# Altium PCB PCB1.PcbDoc
Units mm, origin at the board's own origin, x right, y up, seen from the top; angles counter-clockwise.
Board outline 130.25 x 130.25 mm, 2 copper layers (Top Layer, Bottom Layer); 100 components, 101 nets, 315 pads, 67 vias.
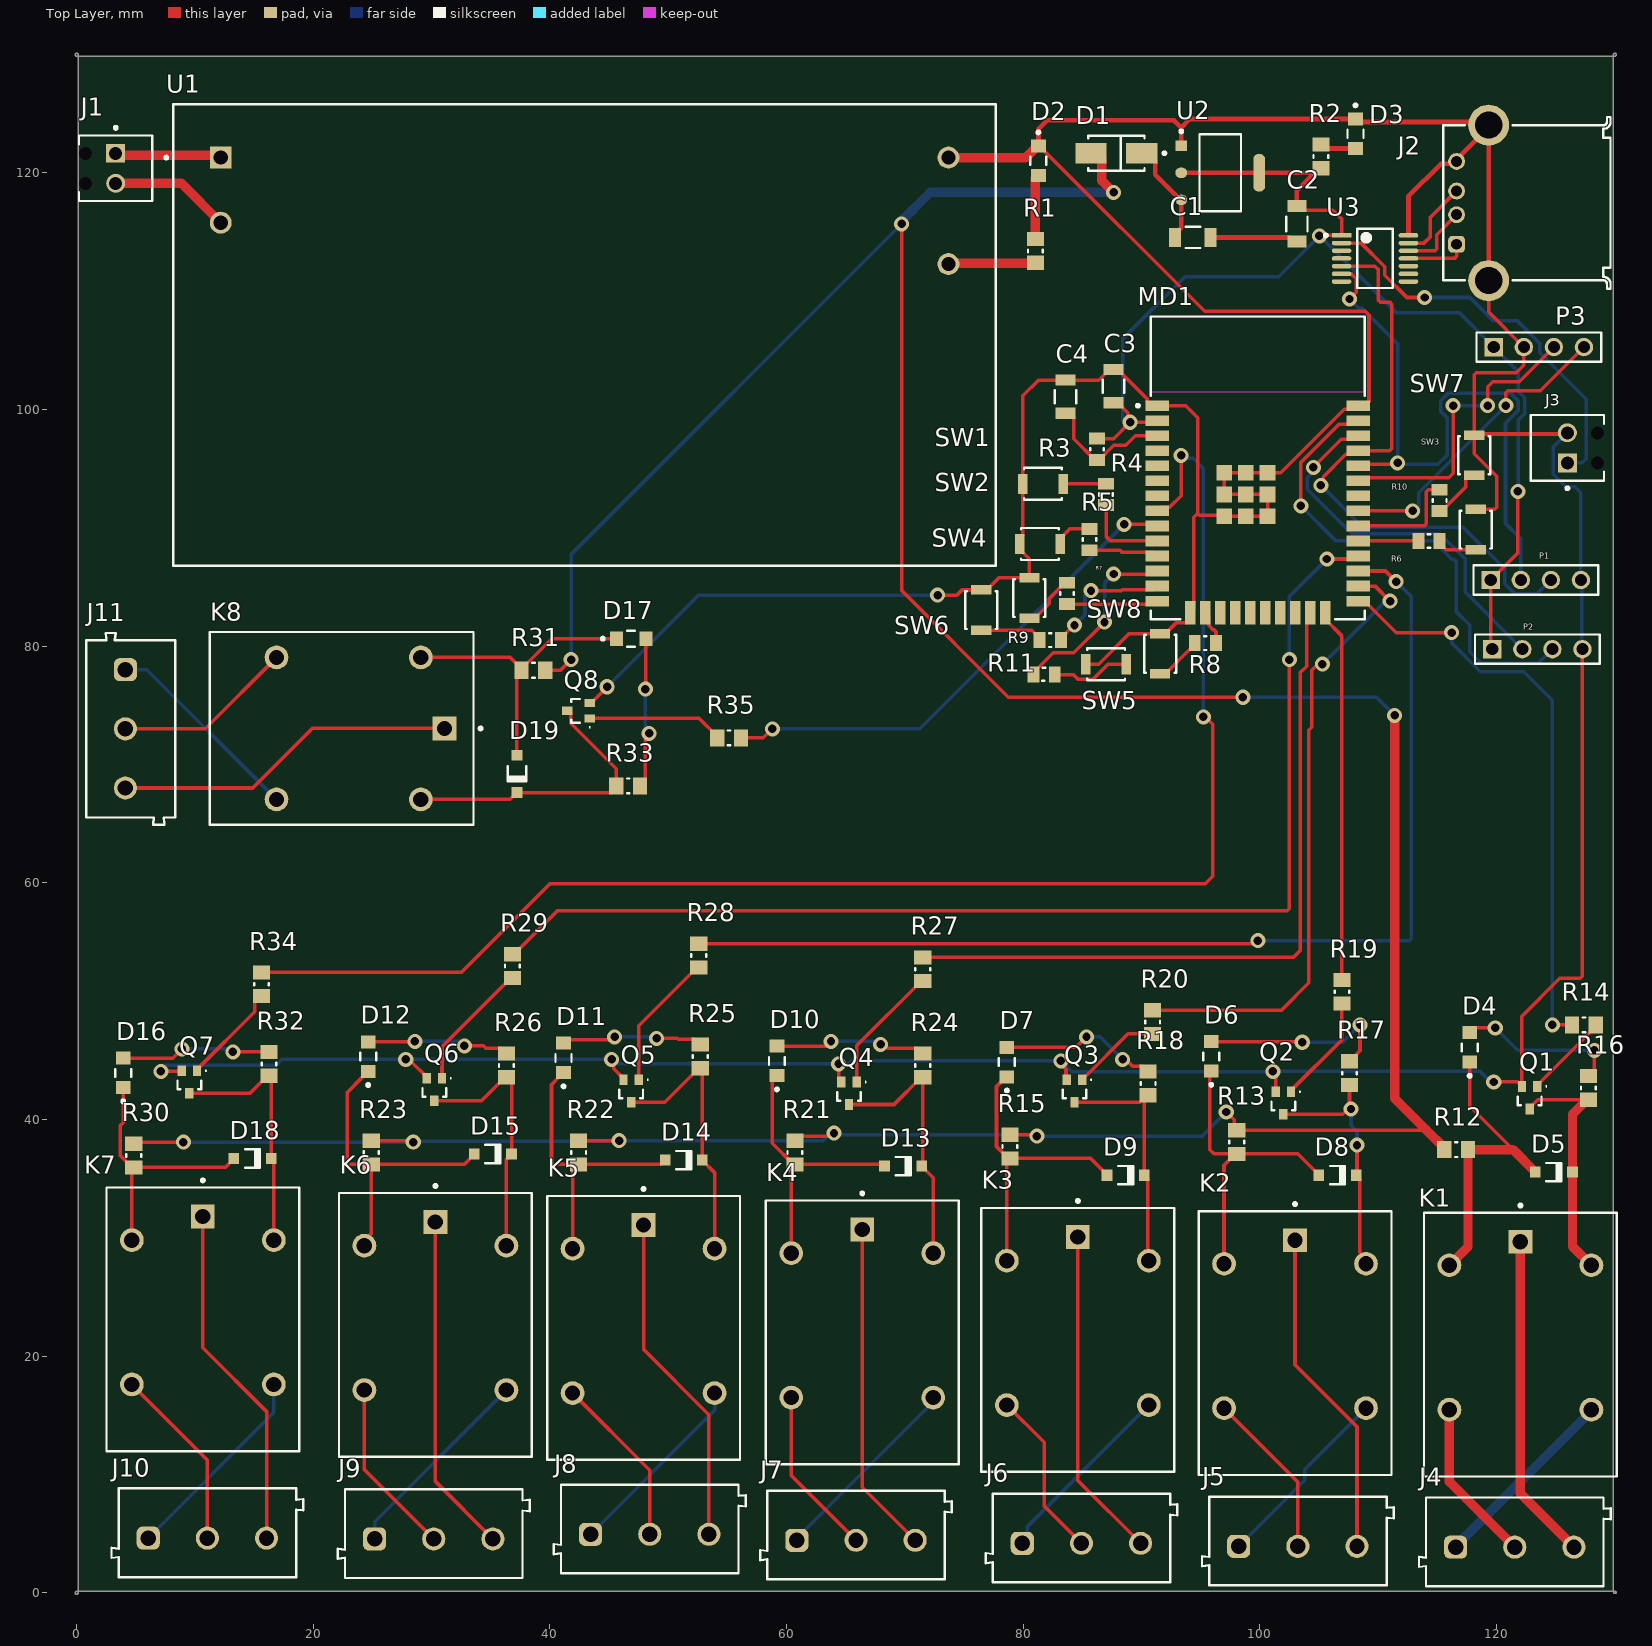
[diagram p0: Top Layer view]
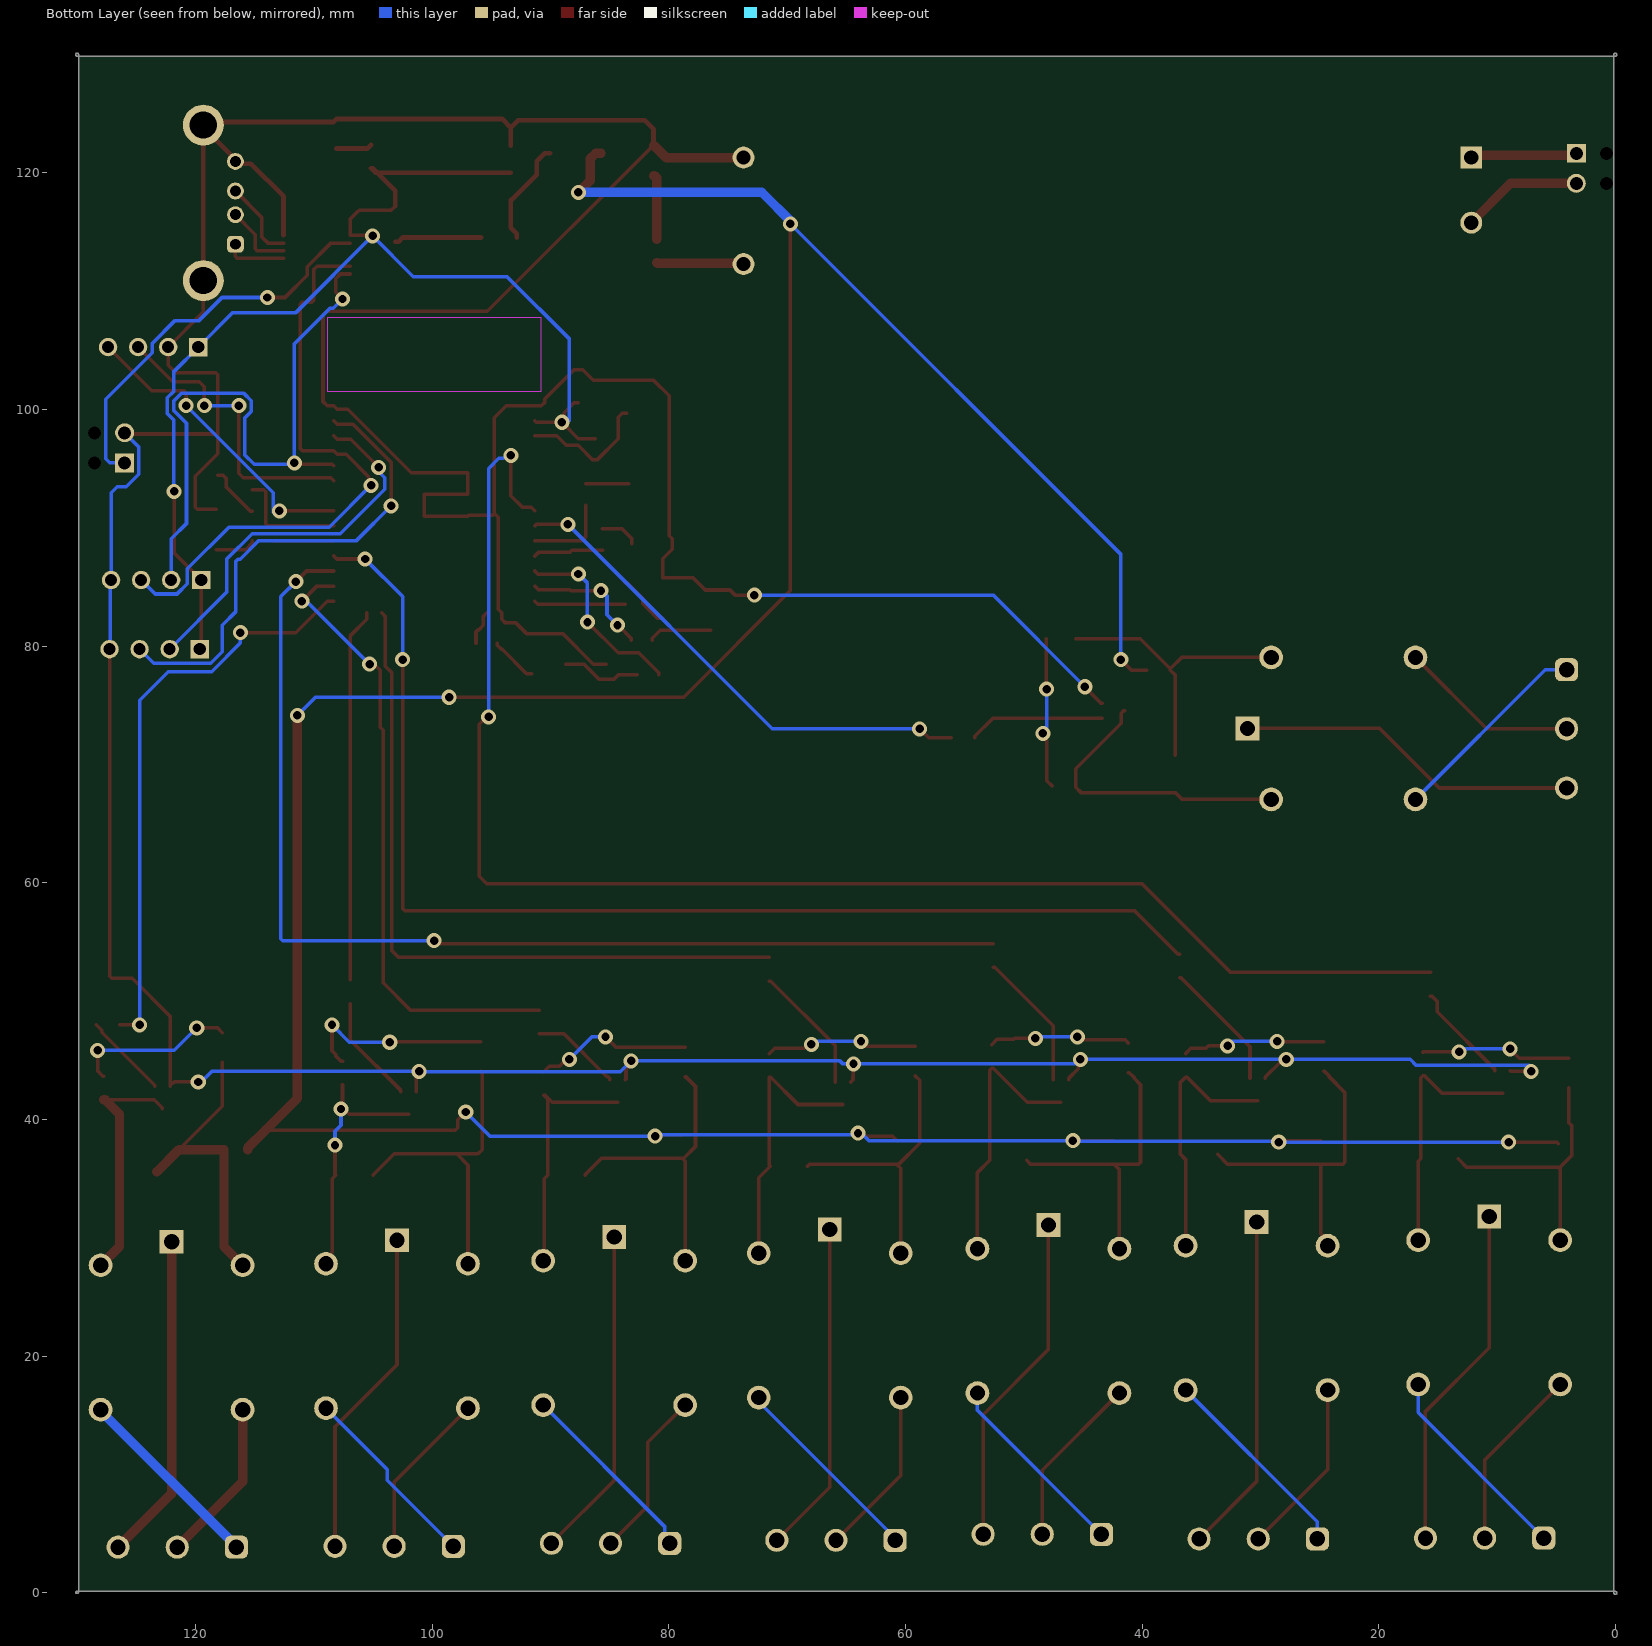
[diagram p1: Bottom Layer view, seen from below]
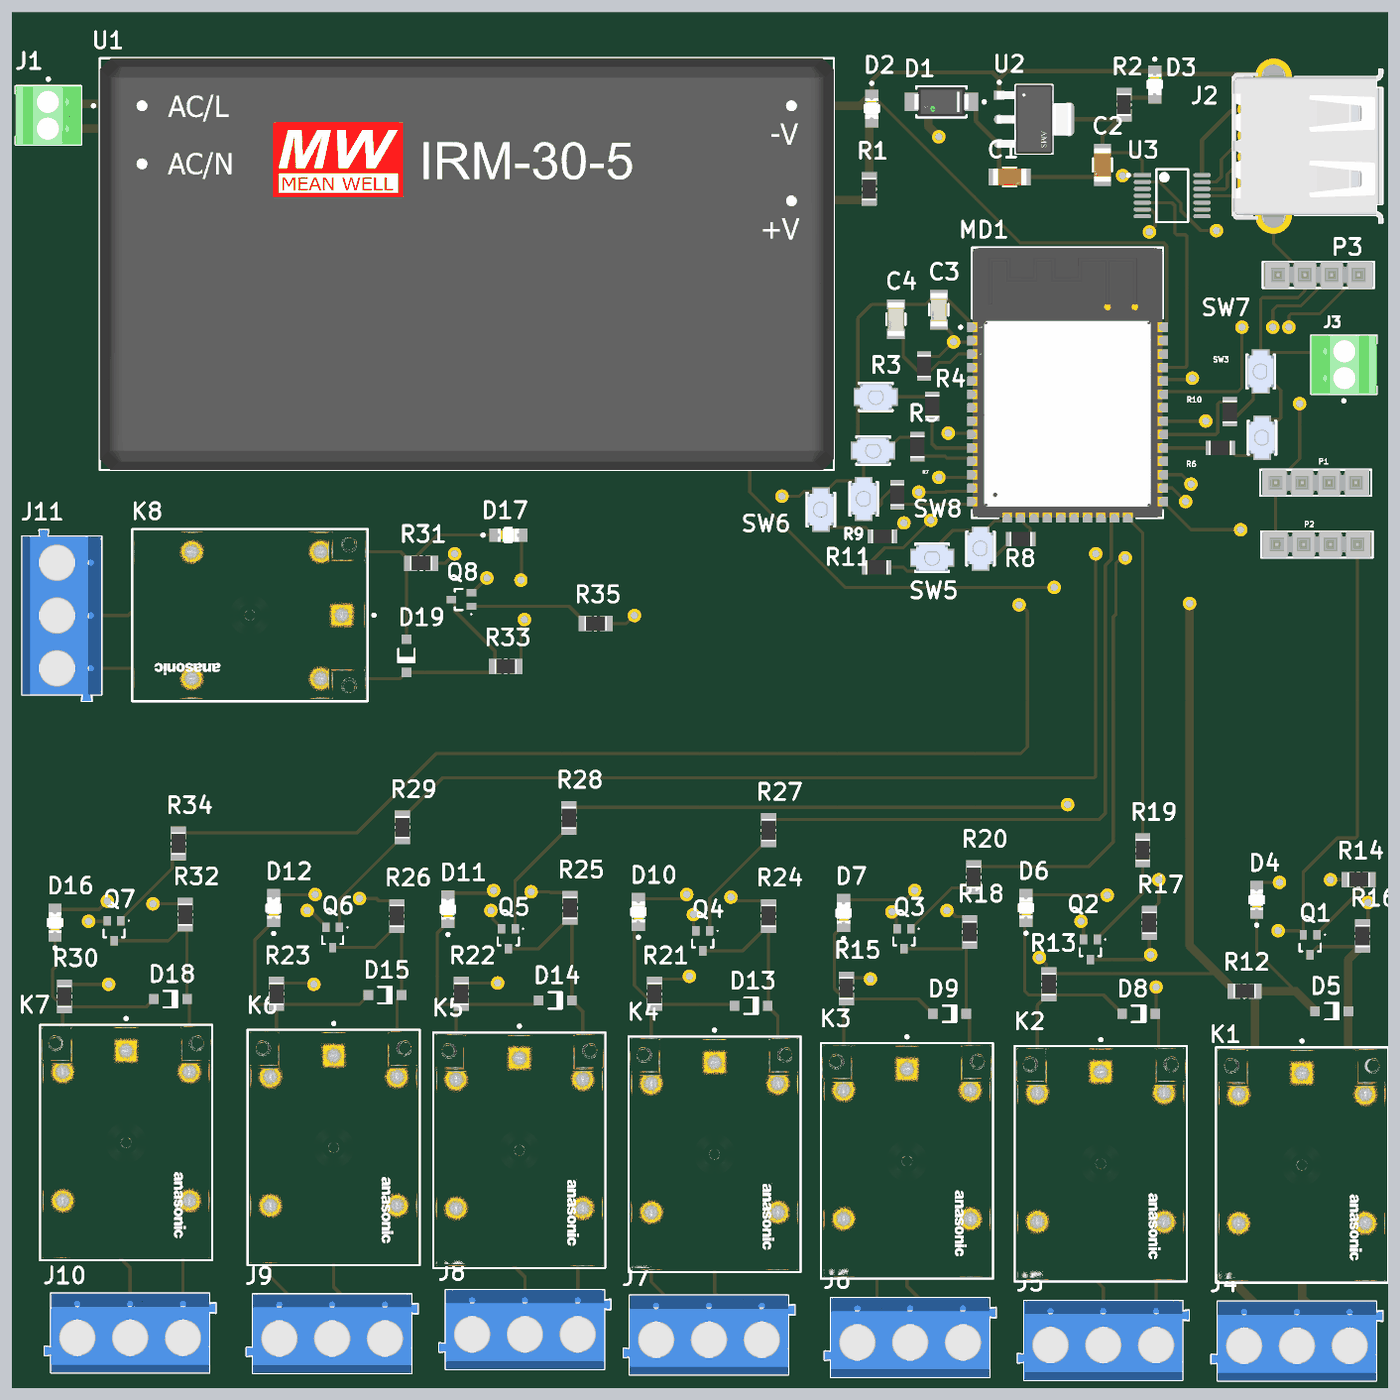
[diagram p2: 3D render of the assembled board from above, using the file's embedded part models]

## Layer stack, top to bottom
Top Solder: solder mask 0.0102, Solder Resist, Dk 3.5
Top Layer: signal copper 0.0356
Dielectric 1: dielectric 0.32, FR-4, Dk 4.8
Bottom Layer: signal copper 0.0356
Bottom Solder: solder mask 0.0102, Solder Resist, Dk 3.5

## Board outline
0,-0.127 cw(c0,0) -0.127,0 cw(c0,0) 0,0.127 130,0.127 cw(c130,0) 130.121,0.039 cw(c130,0.079) 129.873,0.079 129.873,130 cw(c130,130) 130,130.127 cw(c130,130) 130.127,130 cw(c130,130) 130,129.873 0,129.873 cw(c0,130) -0.127,130 cw(c0,130) 0,130.127 cw(c0,130) 0.127,130 0.127,0 cw(c0,0)

## Design rules (kind name [scope] priority, off if disabled: settings)
Clearance [All] p1: gap=0.254 ignorepadtopadclearanceinfootprint=FALSE
PolygonConnect [All] p1: connectstyle=Relief reliefconductorwidth=0.254 reliefentries=4 polygonreliefangle="90 Angle" airgapwidth=0.254
RoutingVias [All] p1: holewidth=0.711 width=1.27 viastyle="Through Hole" minholewidth=0.711 minwidth=1.27 maxholewidth=0.711 maxwidth=1.27
SilkToSilkClearance [All] p1: silktosilkclearance=0.256
SolderMaskExpansion [All] p1: expansion=0 istentingtop=FALSE
SupplyNets "Schematic Supply Nets_2" [InNet('+5')] p1: voltage=0.000
SupplyNets "Schematic Supply Nets_1" [InNet('+3.3V')] p2: voltage=0.000
SupplyNets "Schematic Supply Nets" [InNet('GND')] p3: voltage=0.000
Width [All] p1: maxlimit=5 minlimit=0.254 preferedwidth=0.3
29 further rules are at their usual default settings.

## Classes and differential pairs
component class Relays: D4 D5 D6 D7 D8 D9 D10 D11 D12 D13 D14 D15 D16 D17 D18 D19 J4 J5 J6 J7 J8 J9 J10 J11 K1 K2 K3 K4 K5 K6 K7 K8 Q1 Q2 Q3 Q4 Q5 Q6 Q7 Q8 R12 R13 R14 R15 R16 R17 R18 R19 R20 R21 R22 R23 R24 R25 R26 R27 R28 R29 R30 R31 R32 R33 R34 R35
component class Power: C1 C2 D1 D2 D3 J1 R1 R2 U1 U2
component class Controller: C3 C4 J2 J3 MD1 P1 P2 P3 R3 R4 R5 R6 R7 R8 R9 R10 R11 SW1 SW2 SW3 SW4 SW5 SW6 SW7 SW8 U3

## Components (designator, comment, footprint, x,y, rotation, side; value= is the part's Value field where it differs from the comment)
C1 "0.1uF" FP-1206-L_3_2_0_2-W_1_6_0-MFG 94.337,114.554 r0 top
C2 "0.1uF" FP-1206-L_3_2_0_2-W_1_6_0-MFG 103.124,115.697 r270 top
C3 "0.1uF" FP-C1206C-EB-MFG 87.63,101.981 r90 top value="0.22 μF"
C4 "0.1uF" FP-C1206C-EB-MFG 83.566,101.095 r90 top value="0.22 μF"
D1 "SS14" FP-403AE-MFG 87.875,121.666 r0 top
D2 "LTST-C171KGKT" FP-LTST-C171KGKT-MFG 81.28,121.031 r270 top
D3 "LTST-C171KGKT" FP-LTST-C171KGKT-MFG 108.077,123.317 r270 top
D4 "LTST-C171KGKT" FP-LTST-C171KGKT-MFG 117.729,46.101 r90 top
D5 "1N4148W-7-F" DIOD-SOD123-2_V 124.841,35.56 r0 top
D6 "LTST-C171KGKT" FP-LTST-C171KGKT-MFG 95.885,45.339 r90 top
D7 "LTST-C171KGKT" FP-LTST-C171KGKT-MFG 78.613,44.851 r90 top
D8 "1N4148W-7-F" DIOD-SOD123-2_V 106.553,35.306 r0 top
D9 "1N4148W-7-F" DIOD-SOD123-2_V 88.646,35.306 r0 top
D10 "LTST-C171KGKT" FP-LTST-C171KGKT-MFG 59.182,44.958 r90 top
D11 "LTST-C171KGKT" FP-LTST-C171KGKT-MFG 41.148,45.212 r90 top
D12 "LTST-C171KGKT" FP-LTST-C171KGKT-MFG 24.638,45.319 r90 top
D13 "1N4148W-7-F" DIOD-SOD123-2_V 69.85,36.068 r0 top
D14 "1N4148W-7-F" DIOD-SOD123-2_V 51.308,36.576 r0 top
D15 "1N4148W-7-F" DIOD-SOD123-2_V 35.179,37.084 r0 top
D16 "LTST-C171KGKT" FP-LTST-C171KGKT-MFG 3.937,43.942 r90 top
D17 "LTST-C171KGKT" FP-LTST-C171KGKT-MFG 46.863,80.645 r0 top
D18 "1N4148W-7-F" DIOD-SOD123-2_V 14.859,36.703 r0 top
D19 "1N4148W-7-F" DIOD-SOD123-2_V 37.211,69.215 r270 top
J1 "1725656" PHOE-1725656-2 3.302,120.396 r270 top
J2 "614004190021" 614004190021 122.555,117.475 r90 top
J3 "1725656" PHOE-1725656-2 125.984,96.774 r90 top
J4 "691102710003" 691102710003 121.539,4.318 r0 top
J5 "691102710003" 691102710003 103.204,4.387 r0 top
J6 "691102710003" 691102710003 84.916,4.641 r0 top
J7 "691102710003" 691102710003 65.866,4.895 r0 top
J8 "691102710003" 691102710003 48.434,5.403 r0 top
J9 "691102710003" 691102710003 30.179,5.011 r0 top
J10 "691102710003" 691102710003 11.049,5.08 r0 top
J11 "691102710003" 691102710003 4.572,73.025 r270 top
K1 "JS1-5V-F" FP-JS1-5V-F-MFG 122.016,20.986 r270 top
K2 "JS1-5V-F" FP-JS1-5V-F-MFG 102.966,21.113 r270 top
K3 "JS1-5V-F" FP-JS1-5V-F-MFG 84.613,21.375 r270 top
K4 "JS1-5V-F" FP-JS1-5V-F-MFG 66.39,22.01 r270 top
K5 "JS1-5V-F" FP-JS1-5V-F-MFG 47.91,22.391 r270 top
K6 "JS1-5V-F" FP-JS1-5V-F-MFG 30.322,22.645 r270 top
K7 "JS1-5V-F" FP-JS1-5V-F-MFG 10.668,23.114 r270 top
K8 "JS1-5V-F" FP-JS1-5V-F-MFG 22.391,73.056 r180 top
MD1 "ESP32-WROOM-32" FP-ESP32-WROOM-32-MFG 99.813,95.07 r0 top
P1 "HMTSW-104-23-F-S-237" SMTC-HMTSW-104-23-X-S-237 119.507,85.598 r0 top
P2 "HMTSW-104-23-F-S-237" SMTC-HMTSW-104-23-X-S-237 119.634,79.756 r0 top
P3 "HMTSW-104-23-F-S-237" SMTC-HMTSW-104-23-X-S-237 119.761,105.283 r0 top
Q1 "MMBT2222AWT3G" ONSC-SC-70-3-419-04_V 122.794,41.849 r270 top
Q2 "MMBT2222AWT3G" ONSC-SC-70-3-419-04_V 101.981,41.402 r270 top
Q3 "MMBT2222AWT3G" ONSC-SC-70-3-419-04_V 84.328,42.418 r270 top
Q4 "MMBT2222AWT3G" ONSC-SC-70-3-419-04_V 65.278,42.225 r270 top
Q5 "MMBT2222AWT3G" ONSC-SC-70-3-419-04_V 46.863,42.418 r270 top
Q6 "MMBT2222AWT3G" ONSC-SC-70-3-419-04_V 30.226,42.545 r270 top
Q7 "MMBT2222AWT3G" ONSC-SC-70-3-419-04_V 9.525,43.18 r270 top
Q8 "MMBT2222AWT3G" ONSC-SC-70-3-419-04_V 42.418,74.549 r180 top
R1 "1k" RESC2013X60X35ML10T20 81.026,113.411 r270 top
R2 "1K" RESC2013X60X35ML10T20 105.156,121.396 r270 top
R3 "10K" RESC2013X60X35NL10T20 86.233,96.647 r90 top
R4 "10K" RESC2013X60X35NL10T20 86.995,92.837 r90 top
R5 "10K" RESC2013X60X35NL10T20 85.598,89.016 r90 top
R6 "10K" RESC2013X60X35NL10T20 114.289,88.9 r0 top
R7 "10K" RESC2013X60X35NL10T20 83.693,84.466 r90 top
R8 "10K" RESC2013X60X35NL10T20 95.388,80.264 r180 top
R9 "10K" RESC2013X60X35NL10T20 82.285,80.518 r180 top
R10 "10K" RESC2013X60X35NL10T20 115.189,92.329 r270 top
R11 "10K" RESC2013X60X35NL10T20 81.754,77.597 r0 top
R12 "1k" RESC2013X60X35ML10T20 116.586,37.465 r180 top
R13 "1k" RESC2013X60X35ML10T20 98.044,38.1 r90 top
R14 "1k" RESC2013X60X35ML10T20 127.381,48.006 r0 top
R15 "1k" RESC2013X60X35ML10T20 78.867,37.719 r90 top
R16 "1K" RESC2013X60X35ML10T20 127.762,42.672 r90 top
R17 "1K" RESC2013X60X35ML10T20 107.569,43.926 r90 top
R18 "1K" RESC2013X60X35ML10T20 90.551,43.053 r90 top
R19 "1k" RESC2013X60X35ML10T20 106.934,50.8 r270 top
R20 "1k" RESC2013X60X35ML10T20 90.932,48.244 r270 top
R21 "1k" RESC2013X60X35ML10T20 60.706,37.211 r90 top
R22 "1k" RESC2013X60X35ML10T20 42.418,37.211 r90 top
R23 "1k" RESC2013X60X35ML10T20 24.892,37.211 r90 top
R24 "1K" RESC2013X60X35ML10T20 71.501,44.577 r90 top
R25 "1K" RESC2013X60X35ML10T20 52.705,45.339 r90 top
R26 "1K" RESC2013X60X35ML10T20 36.322,44.577 r90 top
R27 "1k" RESC2013X60X35ML10T20 71.501,52.705 r270 top
R28 "1k" RESC2013X60X35ML10T20 52.578,53.864 r270 top
R29 "1k" RESC2013X60X35ML10T20 36.83,52.975 r270 top
R30 "1k" RESC2013X60X35ML10T20 4.826,36.957 r90 top
R31 "1k" RESC2013X60X35ML10T20 38.608,77.978 r0 top
R32 "1K" RESC2013X60X35ML10T20 16.256,44.704 r90 top
R33 "1K" RESC2013X60X35ML10T20 46.609,68.199 r0 top
R34 "1k" RESC2013X60X35ML10T20 15.621,51.435 r270 top
R35 "1k" RESC2013X60X35ML10T20 55.134,72.263 r180 top
SW1 "B3U-1000P" FP-B3U-1000P-MFG 81.661,93.726 r0 top
SW2 "B3U-1000P" FP-B3U-1000P-MFG 81.407,88.646 r0 top
SW3 "B3U-1000P" FP-B3U-1000P-MFG 118.237,89.867 r270 top
SW4 "B3U-1000P" FP-B3U-1000P-MFG 80.518,84.074 r270 top
SW5 "B3U-1000P" FP-B3U-1000P-MFG 91.567,79.375 r270 top
SW6 "B3U-1000P" FP-B3U-1000P-MFG 76.454,83.058 r270 top
SW7 "B3U-1000P" FP-B3U-1000P-MFG 118.11,96.139 r270 top
SW8 "B3U-1000P" FP-B3U-1000P-MFG 86.995,78.486 r0 top
U1 "IRM-30-5" FP-IRM-30-5-MFG 42.926,106.299 r0 top
U2 "AMS1117-3.3" FP-AMS1117-IPC_C 96.647,120.015 r0 top
U3 "MCP2221A-I/ST" FP-C04-087-IPC_B 109.728,112.776 r0 top

## Footprints (in the part's own frame and the unit in brackets; to place one, negate y for a bottom-side part, rotate by r counter-clockwise, add the part's x,y. Pads: shape width x height; smd on the part's side, far side on the other; paste and mask are expansions set on the pad)
614004190021 [mm] "USB 2.0 Type A Horizontal THT"
  rrect50% 1.42x1.42 hole 0.92: 1(-3.5,5.935)
  round 1.42 hole 0.92: 2(-1,5.935) 3(1,5.935) 4(3.5,5.935)
  round 3.45 hole 2.3: Shell(-6.57,3.225) Shell(6.57,3.225)
  silkscreen extent -7.25,-7.08 7.25,7.07, body extent -7.85,-7.07 7.85,7.08, height 7.8
691102710003 [mm] "5,00mm - modular - blue - Horizontal entry with pressure clamp - 9,9 mm height - 03p"
  rrect50% 1.95x1.95 hole 1.3: 1(-5,-0.45)
  round 1.95 hole 1.3: 2(0,-0.45) 3(5,-0.45)
  silkscreen extent -8.1,-3.75 8.1,3.75, body extent -8.1,-3.75 8.1,3.75, height 9.96
DIOD-SOD123-2_V [mm] "SOD123, 2-Leads, Body 2.7x1.55mm, Height 1.45mm"
  rect 0.9x0.95 smd: 1(-1.575,0) 2(1.575,0)
  silkscreen extent -0.64,-0.82 0.64,0.77, body extent -1.35,-0.77 1.35,0.77, height 1.45
FP-403AE-MFG [mm]
  rect 2.65x1.75 smd paste+0 mask+0: 1(-2.15,0) 2(2.15,0)
  silkscreen extent -2.37,-1.48 4.18,1.48, body extent -3.57,-1.58 3.57,1.58, height 0.25
FP-1206-L_3_2_0_2-W_1_6_0-MFG [mm]
  rect 1x1.6 smd paste+0 mask+0: 1(-1.5,0) 2(1.5,0)
  silkscreen extent -0.63,-0.9 0.63,0.9, body extent -2.1,-1 2.1,1, height 0.25
FP-AMS1117-IPC_C [mm]
  rect 1.004x0.872 smd paste+0 mask+0: 1(-3.295,2.29)
  rrect100% 1.004x0.872 smd paste+0 mask+0: 2(-3.295,0) 3(-3.295,-2.29)
  rrect87% 1.004x3.182 smd paste+0 mask+0: 4(3.295,0)
  silkscreen extent -3.42,-3.25 1.75,3.62, body extent -3.9,-3.35 3.9,3.35, height 0.25
FP-B3U-1000P-MFG [mm]
  rect 0.8x1.7 smd paste+0 mask+0: 1(-1.7,0) 2(1.7,0)
  silkscreen extent -1.6,-1.35 1.6,1.35, body extent -2.2,-1.45 2.2,1.45, height 0.25
FP-C04-087-IPC_B [mm]
  rect 1.655x0.381 smd paste+0 mask+0: 1(-2.825,1.95)
  rrect100% 1.655x0.381 smd paste+0 mask+0: 2(-2.825,1.3) 3(-2.825,0.65) 4(-2.825,0) 5(-2.825,-0.65) 6(-2.825,-1.3) 7(-2.825,-1.95) 8(2.825,-1.95) 9(2.825,-1.3) 10(2.825,-0.65) 11(2.825,0) 12(2.825,0.65) 13(2.825,1.3) 14(2.825,1.95)
  silkscreen extent -4.28,-2.5 1.5,2.5
FP-C1206C-EB-MFG [mm]
  rect 0.95x1.7 smd paste+0 mask+0: 1(-1.4,0) 2(1.4,0)
  silkscreen extent -0.55,-0.9 0.55,0.9, body extent -2,-1 2,1, height 0.25
FP-ESP32-WROOM-32-MFG [mm]
  rect 2x0.9 smd paste+0 mask+0: 1(-8.5,5.26) 2(-8.5,3.99) 3(-8.5,2.72) 4(-8.5,1.45) 5(-8.5,0.18) 6(-8.5,-1.09) 7(-8.5,-2.36) 8(-8.5,-3.63) 9(-8.5,-4.9) 10(-8.5,-6.17) 11(-8.5,-7.44) 12(-8.5,-8.71) 13(-8.5,-9.98) 14(-8.5,-11.25) 25(8.5,-11.25) 26(8.5,-9.98) 27(8.5,-8.71) 28(8.5,-7.44) 29(8.5,-6.17) 30(8.5,-4.9) 31(8.5,-3.63) 32(8.5,-2.36) 33(8.5,-1.09) 34(8.5,0.18) 35(8.5,1.45) 36(8.5,2.72) 37(8.5,3.99) 38(8.5,5.26)
  rect 0.9x2 smd paste+0 mask+0: 15(-5.715,-12.25) 16(-4.445,-12.25) 17(-3.175,-12.25) 18(-1.905,-12.25) 19(-0.635,-12.25) 20(0.635,-12.25) 21(1.905,-12.25) 22(3.175,-12.25) 23(4.445,-12.25) 24(5.715,-12.25)
  rect 1.33x1.33 smd paste+0 mask+0: 39(-2.835,-4.075) 39(-2.835,-2.24) 39(-2.835,-0.405) 39(-1,-4.075) 39(-1,-2.24) 39(-1,-0.405) 39(0.835,-4.075) 39(0.835,-2.24) 39(0.835,-0.405)
  Keep-Out Layer region: -9,6.45 9,6.45 9,12.75 -9,12.75
  Keep-Out Layer region: -9,6.45 9,6.45 9,12.75 -9,12.75
  silkscreen extent -10.25,-12.8 9.05,12.8, body extent -9.6,-13.35 9.6,12.9, height 0.25
FP-IRM-30-5-MFG [mm]
  rect 1.85x1.85 hole 1.2 paste-2539.97 mask+0: 1(-30.75,15)
  round 1.85 hole 1.2 paste-2539.97 mask+0: 2(30.75,15) 3(-30.75,9.5) 4(30.75,6)
  silkscreen extent -35.47,-19.5 34.75,19.5, body extent -34.85,-19.6 34.85,19.6, height 0.25
FP-JS1-5V-F-MFG [mm]
  rect 2x2 hole 1.3 paste-2539.97 mask+0: 1(-8.7,0)
  round 2 hole 1.3 paste-2539.97 mask+0: 2(-6.7,-6) 3(5.5,-6) 4(5.5,6) 5(-6.7,6)
  silkscreen extent -11.87,-8.15 11.15,8.15, body extent -11.25,-8.25 11.25,8.25, height 0.25
FP-LTST-C171KGKT-MFG [mm]
  rect 1.1x1.25 smd paste+0 mask+0: 1(-1.25,0) 2(1.25,0)
  silkscreen extent -2.52,-0.67 0.33,0.67, body extent -1.9,-0.77 1.9,0.77, height 0.25
ONSC-SC-70-3-419-04_V [mm] "SOT23, 3-Leads, Body 2x1.25mm, Pitch 0.65mm"
  rect 0.9x0.7 smd: 1(-0.95,0.65) 2(-0.95,-0.65) 3(0.95,0)
  silkscreen extent -1,-1 0.63,1.45, body extent -0.63,-1 0.63,1, height 1
PHOE-1725656-2 [mm] "Connector, 2-Leads, Body 6.2x5.4mm, Pitch 2.54mm"
  rect 1.6x1.6 hole 1.1: 1(-1.27,0)
  round 1.6 hole 1.1: 2(1.27,0)
  round 0 hole 1.1 unplated: MH1(-1.27,-2.54) MH2(1.27,-2.54)
  silkscreen extent -3.54,-3.1 2.77,3.1, body extent -2.77,-3.1 2.77,3.1, height 9
RESC2013X60X35ML10T20 [mm] "Chip Resistor, 2-Leads, Body 2.1x1.35mm, IPC Low Density"
  rect 1.2x1.45 smd: 1(-1,0) 2(1,0)
  silkscreen extent -0.1,-0.63 0.1,0.63, body extent -1.05,-0.68 1.05,0.67, height 0.6
RESC2013X60X35NL10T20 [mm] "Chip Resistor, 2-Leads, Body 2.1x1.35mm, IPC Medium Density"
  rect 1x1.35 smd: 1(-0.9,0) 2(0.9,0)
  silkscreen extent -0.1,-0.58 0.1,0.58, body extent -1.05,-0.68 1.05,0.67, height 0.6
SMTC-HMTSW-104-23-X-S-237 [mm] "Terminal Strip, 1x2 Pins, Vertical, 2.54mm Pitch, Male"
  rect 1.55x1.55 hole 1.02: 1(0,0)
  round 1.55 hole 1.02: 2(2.54,0) 3(5.08,0) 4(7.62,0)
  silkscreen extent -1.46,-1.24 9.08,1.24, body extent -1.27,-1.27 8.89,1.27, height 8.56

## Part data
C1 C2: library part CMP-04427-018471-1, "General Purpose Ceramic Capacitor, 1206, 2.2uF, 20%, X7R, 15%, 100V", Capacitance=2.2uF, Case/Package=1206, Max Operating Temperature=125°C, Min Operating Temperature=-55°C, Package Quantity=2500, Tolerance=20%, Voltage Rating=100V, Length=0.126inch, Mount="Surface Mount", Packaging="Tape and Reel", RoHS Compliant=Yes, Thickness=0.037inch, Voltage Rating (DC)=100V, Width=0.063inch
C3 C4: library part CMP-03020-032951-1, "C1206 0.22 μF X7R 5.00% 50 V", Capacitance="0.22 μF", Manufacturer=KEMET, Manufacturer Part Number=C1206C224J5RAC, Package=C1206C-EB, Temperature="-55°C to +150°C", Temperature Characteristic=X7R, Temperature Coefficient=15%, Temperature Range High=+150°C, Temperature Range Low=-55°C, Tolerance=0.05, Voltage Rating="50 V", Automotive=Yes, Automotive Grade="Grade 0", Category=Cap, ComponentLink2Description=Datasheet, ComponentLink2URL=https://content.kemet.com/datasheets/KEM_C1007_X8R_ULTRA_150C_SMD.pdf, Device Class L1="Passive Components", Device Class L2=Capacitors, Device Class L3="Ceramic Capacitors", Height=0.88mm, Ipc Land Pattern Name=CAPC320160X78, Lead Free=Yes, Material=Ceramic, Mouser Description="Multilayer Ceramic Capacitors MLCC - SMD/SMT 50volts 0.22 uF 5% X7R", Octopart=https://octopart.com/c1206c224j5rac-kemet-1364890, RoHS=TRUE
D1: library part CMP-2000-04943-2, "DIODE SCHOTTKY 40V 1A SMA", Forward Current=1A, Manufacturer="ON Semiconductor", Max Junction Temp=+125°C, Max Repetitive Reverse Voltage=40V, Max Surge Forward Current=40A, Package=403AE, Peak Reverse Current=0.2mA, Temperature="-65°C to +125°C", Temperature Range Low=-65°C, Automotive=No, Category=Diode, ComponentLink2Description=Datasheet, ComponentLink2URL=https://www.onsemi.com/pub/Collateral/SS19-D.PDF, Device Class L1="Discrete Semiconductors", Device Class L2=Diodes, Device Class L3="Schottky Diodes", Digikey Description="DIODE SCHOTTKY 40V 1A SMA", Height=2.5mm, Lead Free=Yes, Manufacturer Part Number=SS14, Mouser Description="Schottky Diodes & Rectifiers SMA 40V 1.0A", Octopart=https://octopart.com/ss14-on+semiconductor-29205033, RoHS=TRUE, Standoff Height=0.05mm, Temperature Range High=+125°C
D2 D3 D4 D6 D7 D10 D11 D12 D16 D17: library part CMP-22017-000037-1, "LED GREEN CLEAR SMD", Case Code (Imperial)=0805, Case Code (Metric)=2012, Color=Green, Forward Current=30mA, Forward Voltage=2.4V, Lens Color=Colorless, Max Operating Temperature=85°C, Min Operating Temperature=-55°C, Package Quantity=1, Power Dissipation=75mW, Reverse Voltage=5V, Test Current=20mA, Case/Package=0805, Depth=1.25mm, Dominant Wavelength=571nm, Height=0.8mm, Illumination Color=Green, Lead Free="Lead Free", Length=2mm, Lens Style=Rectangular, Lens Transparency=Clear, Luminous Intensity=35mcd, Mount="Surface Mount", Number of Elements=1, Number of LEDs=1, Number of Pins=2, Packaging="Tape and Reel", Power Rating=75mW, Radiation Hardening=No, Viewing Angle=130°, Wavelength=574nm, Width=1.25mm
D5 D8 D9 D13 D14 D15 D18 D19: library part CMP-2000-04932-2, "Fast Switching Diode, 100 V, 0.15 A, -65 to 150 degC, 2-Pin?SOD123, RoHS, Tape and Reel", If - Forward Current=0.15A, Ir - Reverse Current=1uA, Manufacturer=DiodesIncorporated, Max Surge Current=2A, Maximum Operating Temperature=+150C, Minimum Operating Temperature=-65C, Operating Temperature Range=-65Cto+150C, Package / Case=SOD-123, Package Reference=SOD123-2, Peak Reverse Voltage=100V, Vf - Forward Voltage=1.25V, Brand=DiodesIncorporated, Configuration=Single, Datasheet URL=http://www.farnell.com/datasheets/1915529.pdf, Datasheet Version="Rev. 24-2, 10/2013", Factory Pack Quantity=3000, Height=1.25mm, Length=2.85mm, Manufacturer URL=http://www.diodes.com/, Mounting Style=SMD/SMT, Package URL=http://www.diodes.com/datasheets/ds18004.pdf, Packaging=Reel, Product=SwitchingDiodes, Product Category=Diodes-GeneralPurpose,Power,Switching, Recovery Time=4ns, RoHS=True, Series=1N4148, Type=SwitchingDiode, Unit Weight=0.000353oz, Width=1.7mm
J1 J3: library part CMP-2000-05299-1, "Male Header, Pitch 2.54 mm, 1 x 2 Position, Height 9 mm, Tail Length 3.5 mm", Colour=Green, Manufacturer="Phoenix Contact", Content=250pc(s), Datasheet URL=http://datasheet.octopart.com/1725656-Phoenix-Contact-datasheet-5302866.pdf, Datasheet Version=Apr-08, Industrial packaging=Yes, Manufacturer part No.=1725656, Manufacturer URL=http://www.phoenixcontact.com/, Number of Contacts=2, Pitch=2.54mm, Type=MPT0,5/2-2,54
J2: library part CMP-1502-03228-3, "USB Connector, 2.0 TYPE A, RECEPTACLE, THT; Connector Type: USB Type A; Standard: USB 2.0; Gender: Receptacle; No. of...", Contact Resistance=30mΩ, Current Rating=3A, Housing Color=White, Insulation Resistance=1GΩ, Max Operating Temperature=85°C, Min Operating Temperature=-40°C, Operating Supply Voltage=30V, Connector Type=USB, Contact Material=Brass, Contact Plating=Gold, Gender=Receptacle, Insulation Material=PBT, Mount="Horizontal, Through Hole", Number of Contacts=4, Number of Pins=4, Orientation=Horizontal, REACH SVHC=No, RoHS=Compliant, USB Standard="USB 2.0"
J4 J5 J6 J7 J8 J9 J10 J11: library part CMP-1502-03259-3, "102 Series 5MM Pitch Straight, Pcb Terminal Block, Through Hole, 3 Way", Color=Blue, Current=15A, Max Operating Temperature=105°C, Min Operating Temperature=-40°C, Voltage=300V, Contact Material=Brass, Contact Plating=Tin, Current Rating=15A, Height=13.4mm, Housing Material=Nylon, Lead Pitch=5mm, Length=7.5mm, Mount="Through Hole", Number of Contacts=3, Number of Levels=1, Number of Pins=3, Number of Positions Per Level=3, Packaging=Box, Pitch=5.0038mm, Plating=Steel, RoHS=Compliant, Stripping Length=-6mm, Termination=Screw, Voltage Rating=300V, Width=16.2mm, Wire Gauge (Max)=22AWG, Wire Gauge (Min)=14AWG, Wire/Cable Gauge=22AWG
K1 K2 K3 K4 K5 K6 K7 K8: library part CMP-05606-000016-1, "RELAY GEN PURPOSE SPDT 10A 5V", Ambient Temperature Range High=+70°C, Ambient Temperature Range Low=-40°C, Coil Current=72mA, Coil Power=360mW, Coil Resistance=69.4Ω, Coil Voltage=5V, Manufacturer=Panasonic, Switching Current=10A, Switching Power=150W, Temperature="-40°C to +70°C", Automotive=No, Category=Relay, Coil Type=Non-Latching, ComponentLink2Description=Datasheet, ComponentLink2URL=https://www3.panasonic.biz/ac/e_download/control/relay/power/catalog/mech_eng_js.pdf?via=ok, Device Class L1=Electromechanical, Device Class L2=Relays, Device Class L3="Power Relays", Digikey Description="RELAY GEN PURPOSE SPDT 10A 5V", Height=16.8mm, Lead Free=Yes, Manufacturer Part Number=JS1-5V-F, Mouser Description="JS Series 10 A SPDT 5 V Through Hole Sealed Miniature Non-Polarized Power Relay", Number of Contacts=1, Octopart=https://octopart.com/js1-5v-f-panasonic-39428621, Package=JS1-5V-F, RoHS=TRUE, Standoff Height=0.3mm, Temperature Range High=+70°C, Temperature Range Low=-40°C, Throw Configuration=SPDT
MD1: library part CMP-194065-000008-1, "RX TXRX MOD WIFI SURFACE MOUNT", Case/Package=SMD/SMT, Frequency=2.5GHz, Max Operating Temperature=85°C, Min Operating Temperature=-40°C, Operating Supply Voltage=3.6V, Package Quantity=550, Data Rate=150Mbps, Mount="Surface Mount", Packaging="Cut Tape", Sensitivity=-98dBm, Weight=0.088185oz
P1 P2 P3: library part CMP-1024-00021-1, "Modified .025\" SQ Post Header, Through-hole, Vertical, -55 to 125 degC, 2.54 mm Pitch, 4-Pin, Male, RoHS", Manufacturer=Samtec, Temperature Range="-55 to 125 degC", ComponentLink1Description="Manufacturer URL", ComponentLink1URL=http://www.samtec.com, ComponentLink2Description=Datasheet, ComponentLink2URL=http://www.samtec.com/documents/webfiles/pdf/HMTSW.PDF, ComponentLink3Description="Package Specification", ComponentLink3URL=http://www.samtec.com/documents/webfiles/cpdf/HMTSW-XXX-XX-X-X-XXXX-XX-XX-MKT1.pdf, DatasheetVersion=F-214, Mounting Technology=Through-hole, Orientation=Vertical, PackageDescription="Assembly .025 [.64] SQ. Post Hi-Temp Terminal Strip", PackageReference=HMTSW-104-23-X-S-237, PackageVersion="AL, 3/1987", PartNumber=HMTSW-104-23-F-S-237, Pitch="2.54 mm", RoHS=True
Q1 Q2 Q3 Q4 Q5 Q6 Q7 Q8: library part CMP-1048-00383-1, "General Purpose Transistor, NPN Silicon, 3-Pin SC70, Pb-Free, Tape and Reel", Manufacturer="On Semiconductor", ComponentLink1Description="Manufacturer URL", ComponentLink1URL=http://www.onsemi.com/, ComponentLink2Description=Datasheet, ComponentLink2URL=http://www.onsemi.cn/pub_link/Collateral/MMBT2222AWT1-D.PDF, ComponentLink3Description="Package Specification", ComponentLink3URL=http://www.onsemi.cn/pub_link/Collateral/419-04.PDF, DatasheetVersion="Rev. 6", fT Min (MHz)=300, IC Continuous (A)=0.6, Mounting Technology="Surface Mount", PackageDescription="3-Pin Small Outline Transistor, Body 2 x 1.25 mm, Pitch 0.65 mm", PackageReference=SC-70-3-419-04, PackageVersion="Rev. N, 11/2008", Packing="Tape and Reel", PartNumber=MMBT2222AWT3G, Polarity=NPN, RoHS=TRUE
R1 R2 R12 R13 R14 R15 R16 R17 R18 R19 R20 R21 R22 R23 R24 R25 R26 R27 R28 R29 R30 R31 R32 R33 R34 R35: library part CMP-2100-03671-1, "Chip Resistor, 1 KOhm, +/- 1%, 125 mW, -55 to 155 degC, 0805 (2012 Metric), RoHS, Tape and Reel", Case Code (Imperial)=0805, Case Code (Metric)=2012, Manufacturer=Yageo, Max Operating Temperature=155degC, Max Power Dissipation=125mW, Min Operating Temperature=-55degC, Package Description="2-Pin Surface Mounted Device, Body 2 x 1.25 mm", Package Quantity=1, Resistance=1KOhm, Temperature Coefficient=100ppm/degreesC, Tolerance=1%, Voltage Rating=150V, Case/Package=0805, Composition=ThickFilm, Datasheet URL=http://www.yageo.com/NewPortal/yageodocoutput?fileName=/pdf/R-Chip/PYu-RC_Group_51_RoHS_L_5.pdf, Datasheet Version="Rev. 5, 10/2016", Depth=1.25mm, Height=0.024inch, Lead Free=LeadFree, Length=0.079inch, Manufacturer URL=http://www.yageo.com/, Military Standard=Not, Number of Pins=2, Number of Terminations=2, Package Reference=0805, Packaging=TapeandReel, Power Rating=125mW, REACH SVHC=Unknown, RoHSCompliant=true, Termination=SMD/SMT, Voltage Rating (DC)=150V, Width=0.049inch
R3 R4 R5 R6 R7 R8 R9 R10 R11: library part CMP-1659-00013-4, "Chip Resistor, 10 KOhm, +/- 1%, 0.125 W, -55 to 155 degC, 0805 (2012 Metric), RoHS, Tape and Reel", Manufacturer=Yageo, Max Operating Temperature="155 degC", Min Operating Temperature="-55 degC", Package Quantity=5000, Voltage Rating="150 V", ComponentLink1Description="Manufacturer URL", ComponentLink1URL=http://www.yageo.com/, ComponentLink2Description=Datasheet, ComponentLink2URL=http://www.yageo.com/documents/recent/PYu-RC_Group_51_RoHS_L_04.pdf, DatasheetVersion="Rev. 4, 02/2016", Height="0.5 mm", Length="2 mm", Mount="Surface Mount", Mounting Technology="Surface Mount", PackageDescription="2-Pin Surface Mounted Device, Body 2 x 1.25 mm", PackageReference=0805, Packaging="Tape and Reel", Pins=2, REACH SVHC="No SVHC", RoHSCompliant=true
SW1 SW2 SW3 SW4 SW5 SW6 SW7 SW8: library part CMP-2100-03586-2, "SWITCH TACTILE SPST-NO 0.05A 12V", Contact Current Rating=50mA, Contact Resistance=100mR, Insulation Resistance=100MR, Max Operating Temperature=70°C, Max Voltage Rating (DC)=12V, Min Operating Temperature=-25°C, Operating Force=1.5N, Package Quantity=1, Ratings="Dust Proof", Actuator Length=0.4mm, Actuator Type=Standard, Contact Material=Silver, Current Rating=50mA, Depth=2.5mm, Electrical Life=200000Cycles, Height=1.2mm, Illumination Type=Non-Illuminated, Lead Free="Lead Free", Length=4mm, Max Current Rating=50mA, Mechanical Life=200000Cycles, Mount="Surface Mount", Orientation=Straight, Packaging="Tape and Reel", Switch Function=Off-Mom, Switch Travel=0.15mm, Termination=SMD/SMT, Throw Configuration=SPST, Voltage Rating (DC)=12V, Weight=0.000776oz, Width=3mm
U1: library part CMP-28435-000001-1, "AC/DC CONVERTER 5V 30W", Manufacturer="Mean Well", Max Supply Voltage=264V, Min Supply Voltage=85V, Nominal Supply Current=0.5-0.75A, Output Current=6A, Output Voltage=5V, Switching Frequency=65kHz, Temperature="-30°C to +70°C", Temperature Range High=+70°C, Temperature Range Low=-30°C, Automotive=No, Category=IC, ComponentLink2Description=Datasheet, ComponentLink2URL=https://www.meanwell-web.com/content/files/pdfs/productPdfs/MW/IRM-30/IRM-30-spec.pdf, Device Class L1="Integrated Circuits (ICs)", Device Class L2="Power Management ICs", Device Class L3="Voltage Regulators - Switching", Digikey Description="AC/DC CONVERTER 5V 30W", Height=24mm, Lead Free=Yes, Manufacturer Part Number=IRM-30-5, Mouser Description="30W Encapsulated Board Mount Module AC/DC Power Supply with 5VDC Output", Number Of Outputs=1, Octopart=https://octopart.com/irm-30-5-mean+well-50976023, Output Type=Fixed, Package=IRM-30-5, RoHS=TRUE, Switching Topology=Buck
U2: library part CMP-209535-000001-1, "LDO Voltage Regulators 1A, 3.3V", Dropout Voltage=1.1V, Manufacturer="Advanced Monolithic Systems", Max Junction Temp=+125°C, Max Power Dissipation=1.2W, Max Supply Voltage=15V, Nominal Supply Current=5mA, Output Current=1A, Output Voltage=3.3V, Package=AMS1117, Temperature="-40°C to +125°C", Temperature Range Low=-40°C, Automotive=No, Category=IC, ComponentLink2Description=Datasheet, ComponentLink2URL=http://www.advanced-monolithic.com/pdf/ds1117.pdf, Device Class L1="Integrated Circuits (ICs)", Device Class L2="Power Management ICs", Device Class L3="Voltage Regulators - Linear", Height=1.8mm, Ipc Land Pattern Name=SOT229P700X180-4, Lead Free=Yes, Manufacturer Part Number=AMS1117-3.3, Number Of Outputs=1, Octopart=https://octopart.com/ams1117-3.3-advanced+monolithic+systems-25899300, Output Type=Fixed, RoHS=TRUE, Standoff Height=0.64mm, Temperature Range High=+125°C
U3: library part CMP-06284-000021-1, "IC USB TO I2C/UART 14TSSOP", Case/Package=TSSOP, Max Operating Temperature=85°C, Min Operating Temperature=-40°C, Operating Supply Current=13mA, Interface=I2C, Packaging=Rail/Tube, RoHS Compliant=Yes

## Via types
v1: diameter 1.27, hole 0.711, Top Layer to Bottom Layer, 67 vias

## Nets (pads, with @x,y where several pads share a name; then routed paths per layer and width w, separated by ;. In a path a pad name is that pad's centre, name@x,y a point inside that pad or via, vN(x,y) a via of type N, cw(c..) or ccw(c..) an arc to the next point about the centre after c; other vN are vias at no path point)
+3.3V: C2.1 C3.1 MD1.2 P1.1 P2.1 P3.1 R2.2 R3.2 U2.2 U2.4 U3.1 | length 106.2
  Top Layer w0.3: R3.2 87.641,97.547 v1(89.027,98.933) ; C3.1 88.005,100.581 88.841,99.745 88.841,99.119 v1(89.027,98.933) ; MD1.2 91.186,98.933 v1(89.027,98.933) ; C2.1 103.474,116.847 106.165,116.847 106.298,116.714 106.903,116.109 U3.1 105.074,114.726 v1(105.029,114.681) ; P2.1 119.507,79.883 P1.1 121.793,87.884 v1(121.793,93.091)
  Top Layer w0.4: U2.2 U2.4 104.775,120.015 R2.2 105.031,120.396 103.124,118.489 C2.1
  Bottom Layer w0.3: v1(89.027,98.933) 88.568,98.933 88.392,99.109 88.392,105.97 93.663,111.241 101.589,111.241 v1(105.029,114.681) 111.506,108.204 116.84,108.204 P3.1 121.816,103.228 121.816,101.544 122.37,100.99 122.37,99.67 121.816,99.116 v1@121.816,93.091 ; P2.1@119.507,79.883 P2.1
+5: D1.1 R12.2 R13.2 R15.2 R21.2 R22.2 R23.2 R30.2 R31.2 | length 313.8
  Top Layer w0.3: R30.2 4.969,38.1 v1(9.017,38.1) ; R23.2 28.337,38.211 v1(28.448,38.1) ; R31.2 40.894,77.978 v1(41.783,78.867) ; R22.2 45.577,38.211 v1@45.593,38.227 ; R21.2 61.103,38.608 v1@64.135,38.608 ; v1(69.723,115.697) 69.723,84.709 78.74,75.692 v1(98.552,75.692) ; R15.2 81.042,38.719 v1(81.153,38.608) ; v1(97.155,40.64) 97.821,39.974 97.821,39.323 R13.2 114.03,39.1 114.053,39.123
  Top Layer w0.8: D1.1 86.175,121.666 86.65,121.191 86.65,119.344 v1@87.376,118.618 ; v1(111.379,74.168) 111.379,41.797 114.053,39.123 115.586,37.59 R12.2
  Bottom Layer w0.3: v1(9.017,38.1) v1(28.448,38.1) 28.511,38.163 45.783,38.163 v1(45.847,38.227) 63.111,38.227 63.746,38.862 v1(64.008,38.862) 64.135,38.735 81.026,38.735 v1(81.153,38.608) 95.123,38.608 v1(97.155,40.64) ; v1(41.783,78.867) 41.783,87.757 v1(69.723,115.697) ; v1(98.552,75.692) 109.855,75.692 v1(111.379,74.168)
  Bottom Layer w0.8: v1@69.596,115.824 72.136,118.364 v1(87.63,118.364)
GND: C3.2 C4.2 D2.1 D3.1 J2.4 J2.Shell J3.2 MD1.1 MD1.15 MD1.38 MD1.39 P1.4 P2.4 P3.2 Q1.2 Q2.2 Q3.2 Q4.2 Q5.2 Q6.2 Q7.2 Q8.2 SW1.1 SW2.1 SW3.1 SW4.1 SW5.1 SW6.1 SW7.1 SW8.1 U1.2 U2.1 U3.14 | length 470.7
  Top Layer w0.3: v1(7.112,44.069) 8.814,44.069 Q7.2 ; v1(27.813,45.085) 27.999,44.899 28.272,44.899 29.576,43.595 Q6.2 ; Q8.2 43.468,75.199 44.831,76.562 v1(44.831,76.581) ; v1(45.212,45.085) 45.398,44.899 45.398,44.283 46.213,43.468 Q5.2 ; v1(64.389,44.704) 64.389,43.651 64.428,43.612 64.428,43.375 Q4.2 ; v1(72.771,84.328) 74.397,84.328 74.827,84.758 SW6.1 76.904,84.758 77.92,85.774 SW4.1 80.518,87.385 79.707,88.196 SW2.1 79.707,89.096 79.961,89.35 SW1.1 79.961,101.17 81.286,102.495 C4.2 86.369,102.495 87.255,103.381 C3.2 88.005,103.381 90.463,100.923 90.463,100.63 90.763,100.33 MD1.1 93.726,100.33 94.742,99.314 94.742,91.235 ; D2.1 81.355,122.281 95.328,108.308 108.896,108.308 109.217,107.987 109.217,100.684 108.863,100.33 MD1.38 108.013,100.03 107.128,100.03 101.763,94.665 100.648,94.665 98.813,94.665 96.978,94.665 96.978,92.83 98.813,92.83 100.648,92.83 100.648,90.995 98.813,90.995 96.978,90.995 96.914,91.059 94.918,91.059 94.742,91.235 ; v1(83.185,44.958) 83.185,44.696 83.613,44.268 83.613,43.433 Q3.2 ; SW8.1 86.374,78.486 88.963,81.075 SW5.1 92.017,81.075 92.912,81.97 93.798,81.97 94.098,82.27 MD1.15 94.398,83.12 94.398,90.891 94.742,91.235 ; v1@101.219,43.942 101.331,43.83 Q2.2 ; SW3.1 119.839,91.567 120.015,91.743 120.015,94.355 118.11,96.26 SW7.1 ; J2.Shell@119.33,110.905 119.33,108.254 P3.2 122.301,103.759 121.663,103.121 121.415,103.121 121.412,103.124 118.286,103.124 118.11,102.948 SW7.1 ; v1(119.761,43.18) 121.763,43.18 121.844,43.099 121.944,43.099 Q1.2@122.144,42.899 ; Q1.2 Q1.2@122.144,42.899 ; J3.2 125.881,97.941 118.212,97.941 SW7.1 ; P2.4 127.254,52.119 127.078,51.943 125.349,51.943 125.346,51.946 122.144,48.743 Q1.2@122.144,42.899
  Top Layer w0.4: D2.1 81.28,123.698 82.042,124.46 92.73,124.46 93.352,123.838 ; U2.1 93.352,123.838 ; U3.14 112.553,118.014 115.319,120.78 116.425,120.78 J2.4 116.62,121.155 J2.Shell@119.33,123.865 ; J2.Shell@119.33,110.905 J2.Shell@119.33,123.865 ; 93.352,123.838 94.081,124.567 D3.1 108.338,124.306 119.069,124.306 119.33,124.045 J2.Shell@119.33,123.865
  Top Layer w0.8: U1.2 80.223,121.299 81.205,122.281 D2.1
  Bottom Layer w0.3: v1@7.112,44.323 7.112,44.401 7.288,44.577 16.823,44.577 17.331,45.085 v1(27.813,45.085) v1(45.212,45.085) 45.593,44.704 v1(64.389,44.704) 65.278,44.704 65.532,44.958 v1(83.185,44.958) 84.097,44.046 101.069,44.046 v1(101.092,44.069) 118.618,44.069 v1@119.634,43.053 ; v1(44.831,76.581) 52.578,84.328 v1(72.771,84.328) ; J3.2 124.78,96.84 124.78,94.537 125.845,93.472 126.619,93.472 127.127,92.964 P1.4 127.191,85.534 127.191,79.819 P2.4
NetC1_1: C1.1 D1.2 U2.3 | length 9
  Top Layer w0.4: D1.2 90.475,121.666 91.15,120.991 91.15,119.861 93.286,117.725 U2.3 93.352,115.369 92.837,114.854 C1.1
NetC1_2: C1.2 C2.2 | length 7.4
  Top Layer w0.4: C1.2 102.467,114.554 102.824,114.197 C2.2
NetC4_1: C4.1 MD1.3 R3.1 | length 11.3
  Top Layer w0.3: C4.1 83.941,99.695 84.266,99.37 84.266,97.539 86.058,95.747 R3.1 86.408,95.747 87.654,96.993 88.66,96.993 89.457,97.79 MD1.3
NetD2_2: D2.2 R1.1 | length 5.5
  Top Layer w0.8: R1.1 81.026,119.602 81.205,119.781 D2.2
NetD3_2: D3.2 R2.1 | length 3.1
  Top Layer w0.4: R2.1 105.485,122.067 D3.2
NetD4_1: D4.1 D5.1 K1.2 R12.1 | length 28.5
  Top Layer w0.3: D4.1 117.729,41.122 123.266,35.585 D5.1
  Top Layer w0.8: K1.2 117.586,29.256 R12.1 121.386,37.465 D5.1@123.266,35.585
NetD4_2: D4.2 R16.2 | length 13.9
  Top Layer w0.3: D4.2 118.129,47.751 v1(119.888,47.752) v1(119.888,47.752) ; R16.2 127.82,43.672 128.27,44.122 v1(128.27,45.847)
  Bottom Layer w0.3: v1(119.888,47.752) 121.793,45.847 v1(128.27,45.847)
NetD5_2: D5.2 K1.5 Q1.3 R16.1 | length 20.6
  Top Layer w0.3: Q1.3 122.794,40.999 123.467,41.672 R16.1
  Top Layer w0.8: R16.1 127.637,41.672 126.416,40.451 D5.2 126.416,29.286 K1.5
NetD6_1: D6.1 D8.1 K2.2 R13.1 | length 26.6
  Top Layer w0.3: D6.1 95.758,43.962 95.758,37.465 96.123,37.1 R13.1 ; K2.2 96.966,36.147 97.919,37.1 R13.1 ; D8.1 104.978,35.331 103.209,37.1 R13.1
NetD6_2: D6.2 R17.2 | length 16.8
  Top Layer w0.3: D6.2 103.525,46.589 v1@103.632,46.482 ; R17.2 107.694,44.926 108.144,45.376 108.144,45.501 108.458,45.815 v1(108.458,48.006)
  Bottom Layer w0.3: v1(103.578,46.536) 106.988,46.536 v1(108.458,48.006)
NetD7_1: D7.1 D9.1 K3.2 R15.1 | length 25.4
  Top Layer w0.3: K3.2 78.613,36.465 R15.1 ; D7.1 78.538,43.601 77.738,42.801 77.738,37.723 78.742,36.719 R15.1 ; D9.1 87.071,35.331 85.683,36.719 R15.1
NetD7_2: D7.2 R18.2 | length 13.5
  Top Layer w0.3: D7.2 84.455,46.101 v1(85.344,46.99) ; v1(88.392,45.085) 88.654,45.085 89.236,44.503 90.101,44.503 R18.2
  Bottom Layer w0.3: v1(85.344,46.99) 86.487,46.99 v1(88.392,45.085)
NetD8_2: D8.2 K2.5 Q2.3 R17.1 | length 21.7
  Top Layer w0.3: Q2.3 106.992,40.452 107.434,40.894 v1(107.696,40.894) 107.569,41.021 R17.1 ; v1(108.204,37.846) 108.204,35.382 D8.2 108.428,35.006 108.428,28.811 108.966,28.273 K2.5
  Bottom Layer w0.3: v1(107.696,40.894) 107.696,39.531 108.204,39.023 v1(108.204,37.846)
NetD9_2: D9.2 K3.5 Q3.3 R18.1 | length 20.7
  Top Layer w0.3: Q3.3 89.841,41.468 90.426,42.053 R18.1 90.221,41.723 D9.2 90.521,35.006 90.521,28.167 K3.5
NetD10_1: D10.1 D13.1 K4.2 R21.1 | length 23.8
  Top Layer w0.3: D10.1 58.801,43.327 58.801,37.991 60.581,36.211 R21.1 ; K4.2 60.39,35.895 R21.1 ; D13.1 68.132,36.211 R21.1
NetD10_2: D10.2 R24.2 | length 12.9
  Top Layer w0.3: D10.2 63.353,46.208 v1(63.754,46.609) ; v1(67.945,46.355) 68.207,46.355 68.535,46.027 71.051,46.027 R24.2
  Bottom Layer w0.3: v1(63.754,46.609) 67.691,46.609 v1(67.945,46.355)
NetD11_1: D11.1 D14.1 K5.2 R22.1 | length 25.2
  Top Layer w0.3: D11.1 41.073,43.962 40.673,43.562 40.673,43.487 40.132,42.946 40.132,36.387 40.308,36.211 R22.1 ; K5.2 41.91,35.761 42.36,36.211 R22.1 ; D14.1 49.733,36.551 49.393,36.211 R22.1
NetD11_2: D11.2 R25.2 | length 12.2
  Top Layer w0.3: D11.2 41.422,46.736 v1@45.72,46.736 ; v1(49.022,46.863) 50.763,46.863 50.837,46.789 52.255,46.789 R25.2
  Bottom Layer w0.3: v1(45.466,46.99) 48.895,46.99 v1(49.022,46.863)
NetD12_1: D12.1 D15.1 K6.2 R23.1 | length 26.8
  Top Layer w0.3: K6.2 24.322,29.805 24.892,30.375 R23.1 ; D12.1 24.563,44.069 24.163,43.669 24.163,43.594 22.86,42.291 22.86,36.387 23.036,36.211 R23.1 ; D15.1 33.604,37.059 32.756,36.211 R23.1
NetD12_2: D12.2 R26.2 | length 12.1
  Top Layer w0.3: D12.2 28.535,46.569 v1(28.575,46.609) ; v1(32.766,46.228) 34.38,46.228 34.581,46.027 35.872,46.027 R26.2
  Bottom Layer w0.3: v1(28.575,46.609) 32.385,46.609 v1(32.766,46.228)
NetD13_2: D13.2 K4.5 Q4.3 R24.1 | length 22.4
  Top Layer w0.3: Q4.3 69.074,41.275 71.376,43.577 R24.1 71.501,36.144 D13.2 ; D13.2@71.425,36.043 72.39,35.078 K4.5
NetD14_2: D14.2 K5.5 Q5.3 R25.1 | length 22.8
  Top Layer w0.3: Q5.3 49.709,41.468 52.58,44.339 R25.1 52.883,44.161 D14.2 ; D14.2@52.883,36.551 53.91,35.524 K5.5
NetD15_2: D15.2 K6.5 Q6.3 R26.1 | length 21.5
  Top Layer w0.3: Q6.3 34.215,41.595 36.197,43.577 R26.1 36.754,43.145 D15.2 36.754,37.059 36.322,36.627 K6.5
NetD16_1: D16.1 D18.1 K7.2 R30.1 | length 22.4
  Top Layer w0.3: D16.1 3.937,39.746 3.697,39.506 3.697,36.961 4.701,35.957 R30.1 ; K7.2 4.668,35.799 R30.1 ; D18.1 13.284,36.678 12.563,35.957 R30.1
NetD16_2: D16.2 R32.2 | length 12.8
  Top Layer w0.3: D16.2 8.108,45.192 v1(8.89,45.974) ; v1(13.208,45.72) 16.24,45.72 R32.2
  Bottom Layer w0.3: v1(8.89,45.974) 12.954,45.974 v1(13.208,45.72)
NetD17_1: D17.1 D19.1 K8.2 R31.1 | length 25.3
  Top Layer w0.3: K8.2 36.655,79.056 37.608,78.103 40.15,80.645 D17.1 ; D19.1 37.211,77.581 R31.1
NetD17_2: D17.2 R33.2 | length 13
  Top Layer w0.3: R33.2 48.059,68.649 48.059,72.054 48.387,72.382 v1(48.387,72.644) ; v1@48.006,76.327 48.113,76.434 D17.2
  Bottom Layer w0.3: v1(48.06,76.381) 48.06,72.971 v1(48.387,72.644)
NetD18_2: D18.2 K7.5 Q7.3 R32.1 | length 21.4
  Top Layer w0.3: Q7.3 14.657,42.23 16.131,43.704 R32.1 16.434,43.526 D18.2 16.668,36.469 K7.5
NetD19_2: D19.2 K8.5 Q8.3 R33.1 | length 25.2
  Top Layer w0.3: K8.5 36.602,67.056 37.186,67.64 D19.2 45.159,67.64 45.609,68.09 R33.1 45.609,69.641 41.768,73.482 41.768,74.349 41.568,74.549 Q8.3
NetJ1_1: J1.1 U1.1 | length 9
  Top Layer w0.8: J1.1 3.485,121.483 11.993,121.483 U1.1
NetJ1_2: J1.2 U1.3 | length 10.3
  Top Layer w0.8: J1.2 8.849,119.126 U1.3
NetJ2_1: J2.1 U3.11 | length 5.2
  Top Layer w0.3: U3.11 116.444,112.776 116.62,112.952 J2.1
NetJ2_2: J2.2 U3.12 | length 6
  Top Layer w0.3: U3.12 112.568,113.411 114.759,113.411 114.935,113.587 114.935,114.79 J2.2
NetJ2_3: J2.3 U3.13 | length 6.9
  Top Layer w0.3: U3.13 113.87,114.076 114.381,114.587 114.381,116.236 J2.3
NetJ3_1: J3.1 U3.2 | length 33.8
  Top Layer w0.3: U3.2 108.546,114.076 110.536,112.086 110.536,111.366 112.428,109.474 v1(113.919,109.474)
  Bottom Layer w0.3: v1(113.919,109.474) 117.75,109.474 119.694,107.53 121.721,107.53 123.662,105.589 123.662,104.795 127.57,100.887 127.57,95.84 127.234,95.504 J3.1
NetJ4_1: J4.1 K1.4 | length 16.4
  Bottom Layer w0.8: J4.1 116.539,3.915 128.016,15.392 K1.4
NetJ4_2: J4.2 K1.3 | length 13.9
  Top Layer w0.8: K1.3 116.016,9.391 J4.2
NetJ4_3: J4.3 K1.1 | length 27.7
  Top Layer w0.8: K1.1 122.016,8.391 J4.3
NetJ5_1: J5.1 K2.4 | length 16.1
  Bottom Layer w0.3: J5.1 103.776,9.509 103.776,10.423 K2.4
NetJ5_2: J5.2 K2.3 | length 14.3
  Top Layer w0.3: K2.3 103.204,9.375 J5.2
NetJ5_3: J5.3 K2.1 | length 28
  Top Layer w0.3: K2.1 102.966,19.292 108.204,14.054 J5.3
NetJ6_1: J6.1 K3.4 | length 16.1
  Bottom Layer w0.3: J6.1 80.354,4.629 80.354,5.616 K3.4
NetJ6_2: J6.2 K3.3 | length 14.3
  Top Layer w0.3: K3.3 81.769,12.719 81.769,7.338 J6.2
NetJ6_3: J6.3 K3.1 | length 28.1
  Top Layer w0.3: K3.1 84.613,9.494 J6.3
NetJ7_1: J7.1 K4.4 | length 16.8
  Bottom Layer w0.3: J7.1 60.866,4.628 72.39,16.152 K4.4
NetJ7_2: J7.2 K4.3 | length 14.3
  Top Layer w0.3: K4.3 60.39,9.921 J7.2
NetJ7_3: J7.3 K4.1 | length 28.1
  Top Layer w0.3: K4.1 66.39,8.921 J7.3
NetJ8_1: J8.1 K5.4 | length 16.3
  Bottom Layer w0.3: J8.1 53.91,15.429 K5.4
NetJ8_2: J8.2 K5.3 | length 14.6
  Top Layer w0.3: K5.3 48.434,10.367 J8.2
NetJ8_3: J8.3 K5.1 | length 28.4
  Top Layer w0.3: K5.1 47.91,20.582 53.434,15.058 J8.3
NetJ9_1: J9.1 K6.4 | length 17.2
  Bottom Layer w0.3: J9.1 25.179,6.002 K6.4
NetJ9_2: J9.2 K6.3 | length 15
  Top Layer w0.3: K6.3 24.322,10.418 J9.2
NetJ9_3: J9.3 K6.1 | length 28.8
  Top Layer w0.3: K6.1 30.322,9.418 J9.3
NetJ10_1: J10.1 K7.4 | length 17.4
  Bottom Layer w0.3: J10.1 16.668,15.249 K7.4
NetJ10_2: J10.2 K7.3 | length 15.6
  Top Layer w0.3: K7.3 11.049,11.233 J10.2
NetJ10_3: J10.3 K7.1 | length 29.4
  Top Layer w0.3: K7.1 10.668,20.711 16.049,15.33 J10.3
NetJ11_1: J11.1 K8.4 | length 17.3
  Bottom Layer w0.3: J11.1 5.922,78.025 K8.4
NetJ11_2: J11.2 K8.3 | length 15.3
  Top Layer w0.3: J11.2 10.86,73.025 K8.3
NetJ11_3: J11.3 K8.1 | length 29.1
  Top Layer w0.3: J11.3 14.889,68.025 19.92,73.056 K8.1
NetMD1_8: MD1.8 R34.1 | length 126.2
  Top Layer w0.3: R34.1 32.496,52.435 40.005,59.944 95.377,59.944 96.012,60.579 96.012,73.406 v1@95.25,74.168 ; MD1.8 91.613,91.74 92.364,91.74 93.345,92.721 v1(93.345,96.139)
  Bottom Layer w0.3: 93.98,95.885 94.361,95.885 95.225,95.021 v1(95.225,74.029)
NetMD1_9: MD1.9 R35.1 | length 42.7
  Top Layer w0.3: R35.1 58.039,72.263 v1(58.801,73.025) ; v1(88.519,90.297) 91.186,90.297 MD1.9
  Bottom Layer w0.3: v1(58.801,73.025) 71.247,73.025 v1(88.519,90.297)
NetMD1_10: MD1.10 R4.1 | length 7.1
  Top Layer w0.3: R4.1 86.995,89.281 87.376,88.9 MD1.10
NetMD1_11: MD1.11 R5.1 | length 5.9
  Top Layer w0.3: R5.1 88.2,88.116 88.386,87.93 91.013,87.93 MD1.11
NetMD1_12: MD1.12 R11.1 | length 16.1
  Top Layer w0.3: R11.1 80.854,77.772 82.521,79.439 84.265,79.439 v1(86.868,82.042) ; v1(87.63,86.106) 91.059,86.106 MD1.12
  Bottom Layer w0.3: v1(86.868,82.042) 86.868,85.344 v1(87.63,86.106)
NetMD1_13: MD1.13 R9.1 | length 10.7
  Top Layer w0.3: R9.1 83.185,80.693 84.153,81.661 84.201,81.661 v1(84.328,81.788) ; v1(85.725,84.709) 88.278,84.709 88.359,84.79 91.013,84.79 MD1.13
  Bottom Layer w0.3: v1(84.328,81.788) 85.217,82.677 85.217,84.279 85.393,84.455 v1@85.471,84.455
NetMD1_14: MD1.14 R7.1 | length 7.7
  Top Layer w0.3: R7.1 91.059,83.566 MD1.14
NetMD1_16: MD1.16 R8.1 | length 3
  Top Layer w0.3: MD1.16 95.668,82.52 95.668,81.769 96.021,81.416 96.112,81.416 96.288,81.24 R8.1
NetMD1_23: MD1.23 R27.1 | length 61
  Top Layer w0.3: R27.1 102.821,53.705 103.39,54.273 103.39,77.757 103.958,78.325 103.958,82.52 MD1.23
NetMD1_24: MD1.24 R19.1 | length 31.6
  Top Layer w0.3: MD1.24 105.528,82.27 106.934,80.864 R19.1
NetMD1_25: MD1.25 R14.1 | length 49.5
  Top Layer w0.3: MD1.25 108.863,83.82 111.53,81.153 v1(116.205,81.153) ; v1(124.714,48.006) R14.1
  Bottom Layer w0.3: v1(116.205,81.153) 116.205,80.28 118.634,77.851 122.301,77.851 124.714,75.438 v1(124.714,48.006)
NetMD1_26: MD1.26 R20.1 | length 52.5
  Top Layer w0.3: R20.1 101.822,49.244 104.14,51.562 104.14,72.898 104.394,73.152 104.394,77.978 v1@104.902,78.486 ; MD1.26 109.728,85.09 v1(110.998,83.82)
  Bottom Layer w0.3: v1(105.283,78.486) 110.617,83.82 v1(110.998,83.82)
NetMD1_27: MD1.27 R28.1 | length 94.6
  Top Layer w0.3: R28.1 99.568,54.864 v1(99.822,55.118) ; MD1.27 110.617,86.36 v1(111.506,85.471)
  Bottom Layer w0.3: v1(99.822,55.118) 112.6,55.118 112.776,55.294 112.776,84.201 v1(111.506,85.471)
NetMD1_28: MD1.28 R29.1 | length 100.9
  Top Layer w0.3: R29.1 36.955,53.975 40.638,57.658 102.313,57.658 102.489,57.834 v1(102.489,78.867) ; v1(105.664,87.376) 108.059,87.376 MD1.28
  Bottom Layer w0.3: v1(102.489,78.867) 102.489,84.201 v1(105.664,87.376)
NetMD1_29: MD1.29 R6.1 | length 5.1
  Top Layer w0.3: MD1.29 R6.1
NetMD1_30: MD1.30 R10.1 | length 9.7
  Top Layer w0.3: MD1.30 113.87,90.17 114.046,90.346 114.046,93.053 114.222,93.229 R10.1
NetMD1_31: MD1.31 P3.4 | length 26.9
  Top Layer w0.3: MD1.31 v1(112.903,91.44) ; v1(120.777,100.33) 120.777,101.424 120.953,101.6 123.698,101.6 P3.4
  Bottom Layer w0.3: v1@112.649,91.186 112.776,91.059 113.157,91.059 113.411,91.313 113.411,92.964 v1(120.777,100.33)
NetMD1_33: MD1.33 P3.3 | length 25.5
  Top Layer w0.3: MD1.33 108.567,94.234 115.951,94.234 116.332,94.615 v1(116.332,100.33) ; v1(119.253,100.33) 119.253,101.932 119.683,102.362 121.92,102.362 P3.3
  Bottom Layer w0.3: v1(116.332,100.33) v1(119.253,100.33)
NetMD1_34: MD1.34 P1.2 U3.6 | length 55
  Top Layer w0.3: U3.6 106.918,111.461 107.746,111.461 108.134,111.072 108.134,109.912 v1(107.569,109.347) ; MD1.34 108.44,95.377 v1@111.633,95.377
  Bottom Layer w0.3: v1(107.569,109.347) 108.342,108.574 108.63,108.574 111.633,105.571 v1(111.633,95.504) 111.76,95.377 115.041,95.377 115.813,96.15 115.813,99.325 115.293,99.845 115.293,100.76 115.902,101.369 121.207,101.369 121.816,100.76 121.816,99.9 120.754,98.838 120.754,90.375 122.047,89.082 P1.2
NetMD1_35: MD1.35 P1.3 U3.5 | length 51.3
  Top Layer w0.3: v1(105.156,93.599) 105.342,93.785 105.342,94.3 107.262,96.22 108.013,96.22 MD1.35 110.949,96.52 111.125,96.696 111.125,108.917 110.949,109.093 110.158,109.093 109.982,109.269 109.982,111.857 109.713,112.126 U3.5
  Bottom Layer w0.3: v1(105.156,93.599) 108.685,90.07 117.157,90.07 120.686,86.54 120.686,85.292 121.559,84.419 123.408,84.419 P1.3
NetMD1_36: MD1.36 P2.2 | length 32.4
  Top Layer w0.3: v1(104.521,95.123) 106.888,97.49 108.013,97.49 MD1.36
  Bottom Layer w0.3: v1(104.521,95.123) 104.521,94.742 104.013,94.234 104.013,93.273 107.77,89.516 115.208,89.516 117.348,87.376 117.348,84.582 P2.2
NetMD1_37: MD1.37 P2.3 | length 41
  Top Layer w0.3: v1(103.459,91.867) 103.459,95.53 106.689,98.76 108.013,98.76 MD1.37
  Bottom Layer w0.3: v1(103.459,91.867) 106.3,89.026 106.426,88.9 114.681,88.9 116.216,87.365 116.4,87.365 116.575,87.19 116.575,82.942 117.729,81.788 117.729,79.54 118.692,78.577 123.535,78.577 P2.3
NetQ1_1: Q1.1 R14.2 | length 7.3
  Top Layer w0.3: Q1.1 123.444,42.899 127.931,47.386 127.931,47.556 R14.2
NetQ2_1: Q2.1 R19.2 | length 9.2
  Top Layer w0.3: Q2.1 102.631,42.452 106.934,46.755 R19.2
NetQ3_1: Q3.1 R20.2 | length 7.6
  Top Layer w0.3: Q3.1 84.978,43.468 85.178,43.668 85.278,43.668 88.854,47.244 R20.2
NetQ4_1: Q4.1 R27.2 | length 10.9
  Top Layer w0.3: Q4.1 65.928,46.257 71.376,51.705 R27.2
NetQ5_1: Q5.1 R28.2 | length 11.7
  Top Layer w0.3: Q5.1 47.513,47.924 52.453,52.864 R28.2
NetQ6_1: Q6.1 R29.2 | length 11
  Top Layer w0.3: Q6.1 30.876,46.146 36.705,51.975 R29.2
NetQ7_1: Q7.1 R34.2 | length 8.6
  Top Layer w0.3: Q7.1 10.175,44.23 15.046,49.101 15.046,49.985 15.496,50.435 R34.2
NetQ8_1: Q8.1 R35.2 | length 11.5
  Top Layer w0.3: Q8.1 52.623,73.899 54.134,72.388 R35.2
NetR1_2: R1.2 U1.4 | length 7.4
  Top Layer w0.8: U1.4 73.732,112.355 80.97,112.355 R1.2
NetR4_2: R4.2 SW1.2 | length 3.6
  Top Layer w0.3: SW1.2 86.984,93.726 R4.2
NetR5_2: R5.2 SW2.2 | length 3.3
  Top Layer w0.3: SW2.2 83.107,89.096 83.927,89.916 R5.2
NetR6_2: R6.2 SW3.2 | length 3.5
  Top Layer w0.3: R6.2 115.189,88.725 115.747,88.167 SW3.2
NetR7_2: R7.2 SW4.2 | length 4.7
  Top Layer w0.3: SW4.2 80.968,82.374 82.193,83.599 82.193,84.041 83.518,85.366 R7.2
NetR8_2: R8.2 SW5.2 | length 4.1
  Top Layer w0.3: SW5.2 92.017,77.675 94.081,79.739 94.138,79.739 94.488,80.089 R8.2
NetR9_2: R9.2 SW6.2 | length 5.4
  Top Layer w0.3: SW6.2 80.72,81.358 81.385,80.693 R9.2
NetR10_2: R10.2 SW7.2 | length 4.6
  Top Layer w0.3: R10.2 115.364,91.429 117.41,93.475 117.41,94.189 117.66,94.439 SW7.2
NetR11_2: R11.2 SW8.2 | length 6.7
  Top Layer w0.3: R11.2 84.251,77.597 84.616,77.232 85.903,77.232 87.157,78.486 SW8.2
pads on no net: J1.MH1 J1.MH2 J3.MH1 J3.MH2 MD1.4 MD1.5 MD1.6 MD1.7 MD1.17 MD1.18 MD1.19 MD1.20 MD1.21 MD1.22 MD1.32 U3.3 U3.4 U3.7 U3.8 U3.9 U3.10

## Silkscreen, mask and mechanical layers (free items; w line width, h text height)
Mechanical 1:
  lines w0.254: 130,0 0,0 0,130 130,130 130,0.079